# EAGLE board flowerfriend_rev2 (EAGLE 7.2.0)
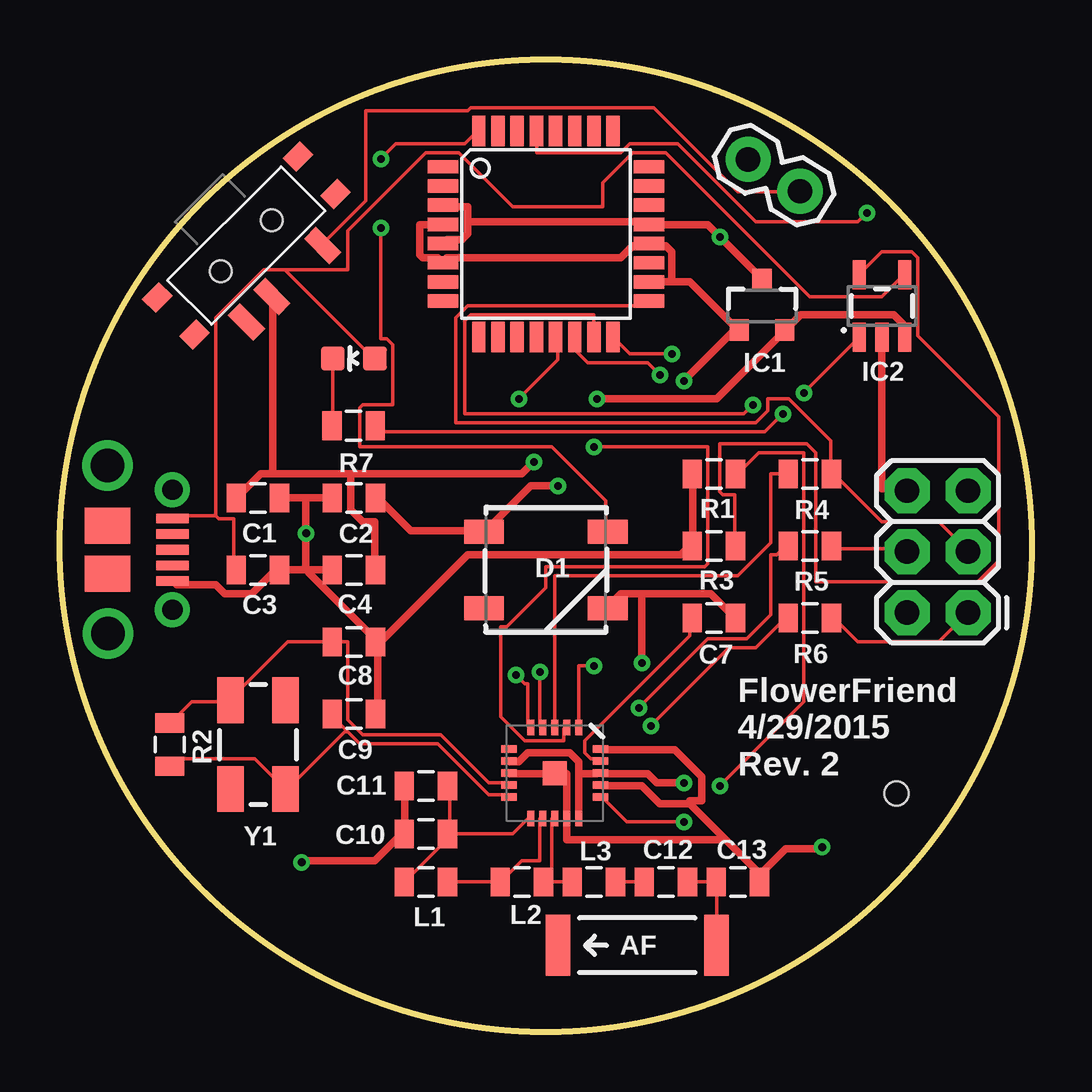
[diagram p0: board, top side]
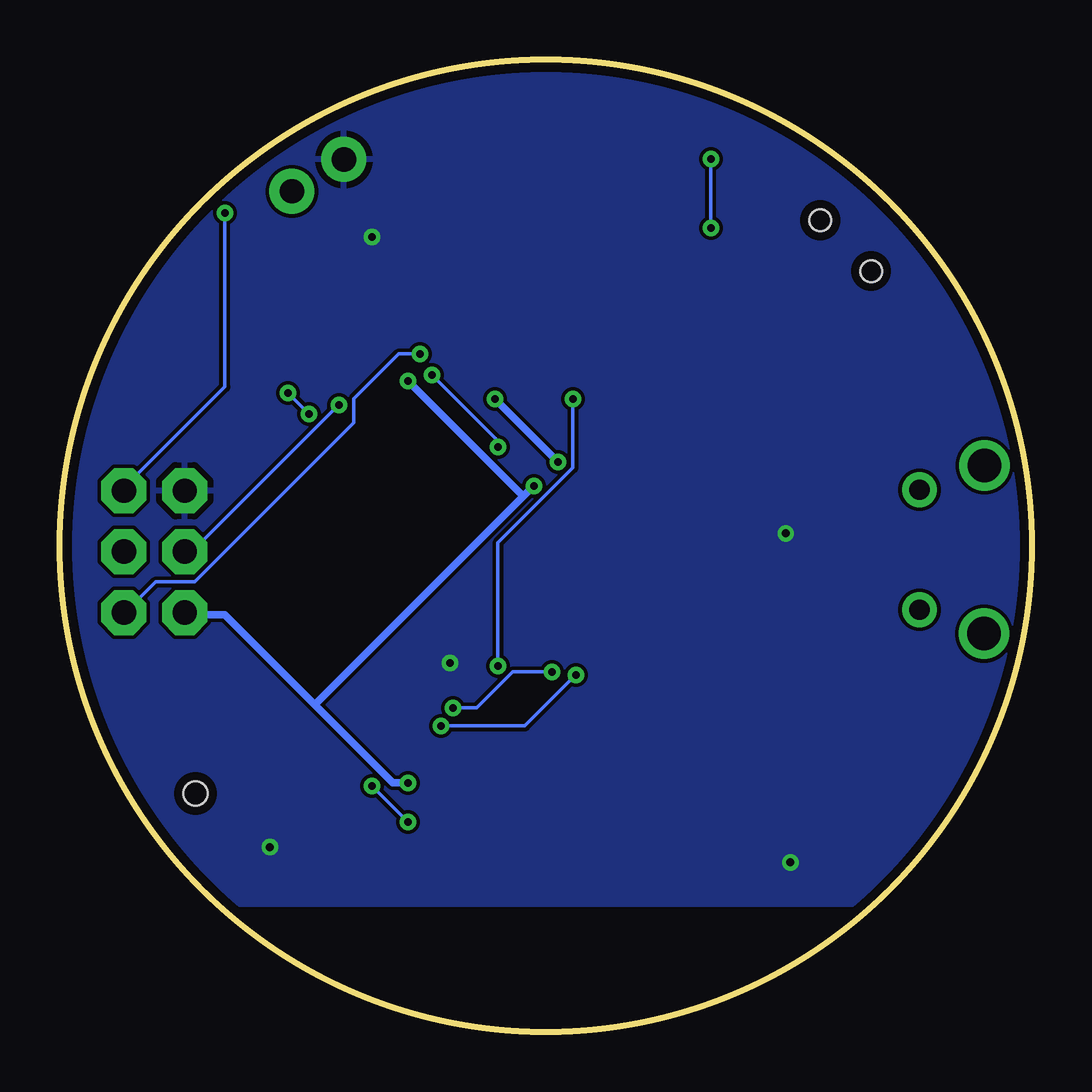
[diagram p1: board, bottom side, seen from below]

Size 40.5 x 40.5 mm. Coordinates in mm from the lower left corner, seen from the top.
Outline: circle at 20.25,20.25 radius 20.25
Copper layers (1*16): Top 0.0356mm / dielectric 1.5011mm / Bottom 0.0356mm
Design rules "LaenPCBOrder *": minimum track width 6mil, minimum drill 13mil, track to track 6mil, track to pad 6mil, pad to pad 6mil, via to via 6mil, smd to smd 6mil, copper to edge 15mil, drill to drill 6mil, minimum pad ring 7mil, minimum via ring 7mil, stop-mask expansion 3mil, vias tented up to drill 0mil, thermal gap 10mil
Net classes: 1 power: width 0.305 mm
Holes 1 mm at 34.85,9.93

## Footprints (pad centres in the part's own frame; a part is rotated, then mirrored left to right if it is on the bottom)
ANTENNA-CHIP5 = smd 1.016 x 2.54: FEED -3.302,0; NC 3.302,0
0805 = smd 0.8 x 1.2: 1 -0.9,0; 2 0.9,0
WS2812B = smd 1.651 x 1: 1 -2.577,1.6; 2 -2.577,-1.6; 3 2.577,-1.6; 4 2.577,1.6
LED-0603 = smd 1 x 1: A 0,-0.877; C 0,0.877
SOT23-3 = smd 0.8 x 0.9: 1 -0.95,-1; 2 0.95,-1; 3 0,1.1
SOT23-5 = smd 0.55 x 1.2: 1 -0.95,-1.3; 2 0,-1.3; 3 0.95,-1.3; 4 0.95,1.3; 5 -0.95,1.3
1X02 = drill 1.016 pad 1.88: 1 0,0; 2 2.54,0
2X3 = drill 1.016 pad 1.88 octagon: 1 0,0; 2 0,2.54; 3 2.54,0; 4 2.54,2.54; 5 5.08,0; 6 5.08,2.54
KPS-1290 = smd 0.7 x 1.5: O -2.25,2.25; P 0.75,2.25; S 2.25,2.25 | smd 1 x 0.8: P$1 -4.15,1.1; P$2 -4.15,-1.1; P$3 4.15,-1.1; P$4 4.15,1.1 | hole 0.9: -1.5,0; 1.5,0
TQFP32-08 = smd 1.27 x 0.559: 1 -4.293,2.8; 2 -4.293,2; 3 -4.293,1.2; 4 -4.293,0.4; 5 -4.293,-0.4; 6 -4.293,-1.2; 7 -4.293,-2; 8 -4.293,-2.8; 17 4.293,-2.8; 18 4.293,-2; 19 4.293,-1.2; 20 4.293,-0.4; 21 4.293,0.4; 22 4.293,1.2; 23 4.293,2; 24 4.293,2.8 | smd 0.559 x 1.27: 9 -2.8,-4.293; 10 -2,-4.293; 11 -1.2,-4.293; 12 -0.4,-4.293; 13 0.4,-4.293; 14 1.2,-4.293; 15 2,-4.293; 16 2.8,-4.293; 25 2.8,4.293; 26 2,4.293; 27 1.2,4.293; 28 0.4,4.293; 29 -0.4,4.293; 30 -1.2,4.293; 31 -2,4.293; 32 -2.8,4.293
QFN20 = smd 1 x 1: 0 0,0 | smd 0.65 x 0.3: 1 -1.9,1; 2 -1.9,0.5; 3 -1.9,0; 4 -1.9,-0.5; 5 -1.9,-1; 11 1.9,-1; 12 1.9,-0.5; 13 1.9,0; 14 1.9,0.5; 15 1.9,1 | smd 0.3 x 0.65: 6 -1,-1.9; 7 -0.5,-1.9; 8 0,-1.9; 9 0.5,-1.9; 10 1,-1.9; 16 1,1.9; 17 0.5,1.9; 18 0,1.9; 19 -0.5,1.9; 20 -1,1.9
USB-MICRO-MOLEX-105017-0001 = smd 0.4 x 1.35: 1 1.2,0; 2 1.85,0; 3 2.5,0; 4 3.15,0; 5 3.8,0 | drill 0.85 pad 1.45: P$1 0,0; P$2 5,0 | smd 1.5 x 1.9: P$3 3.5,-2.7; P$4 1.5,-2.7 | drill 1.4: P$5 -1.004,-2.701; P$6 5.999,-2.69
CRYSTAL-SMD-5X3 = smd 1.9 x 1.1: 1 -1.85,-1.15; 2 1.85,-1.15; 3 1.85,1.15; 4 -1.85,1.15

## Placement (x,y rotation side)
AF  ANTENNA2SMD5  [ANTENNA-CHIP5]  24.05,3.61 180 top
C1  0.1uF  [0805]  8.25,22.25 180 top
C2  0.1uF  [0805]  12.25,22.25 0 top
C3  4.7uF  [0805]  8.25,19.25 180 top
C4  4.7uF  [0805]  12.25,19.25 0 top
C7  33nF  [0805]  27.25,17.25 180 top
C8  22pF  [0805]  12.25,16.25 180 top
C9  22pF  [0805]  12.25,13.25 180 top
C10  2.2nF  [0805]  15.25,8.25 0 top
C11  4.7pF  [0805]  15.25,10.25 0 top
C12  1.5pF  [0805]  25.25,6.25 180 top
C13  1.0pF  [0805]  28.25,6.25 180 top
D1  [WS2812B]  20.25,19.25 0 top
D2  RED  [LED-0603]  12.24,28.06 90 top
IC1  LM3480IM4  [SOT23-3]  29.25,30.25 0 top
IC2  MCP73831  [SOT23-5]  34.25,30.25 0 top
JP1  [1X02]  28.67,36.36 328.4 top
JP2  ICSP  [2X3]  37.84,17.47 90 top
L1  2.7nH  [0805]  15.25,6.25 180 top
L2  8.2nH  [0805]  19.25,6.25 180 top
L3  3.9nH  [0805]  22.25,6.25 0 top
PWR_SWITCH  [KPS-1290]  7.76,32.76 225 top
R1  22k  [0805]  27.25,23.25 0 top
R2  1M  [0805]  4.57,11.97 270 top
R3  2.5k  [0805]  27.25,20.25 0 top
R4  10k  [0805]  31.25,23.25 0 top
R5  10k  [0805]  31.25,20.25 0 top
R6  10k  [0805]  31.25,17.25 0 top
R7  470  [0805]  12.23,25.26 180 top
U2  ATMEGA328P  [TQFP32-08]  20.25,33.25 0 top
U$1  NRF24L01SMD  [QFN20]  20.61,10.79 270 top
USB1  USB-CON-5PIN-105017-0001  [USB-MICRO-MOLEX-105017-0001]  4.68,22.59 270 top
Y1  16MHz  [CRYSTAL-SMD-5X3]  8.25,11.97 270 top

## Library data of the parts
AF U$1 = SparkFun-RF
C1-C4 C7-C13 L1-L3 R1-R7 = SparkFun-Passives
D1 = SparkFun-LED; PROD_ID: DIO-12503
D2 = SparkFun-LED; PROD_ID: DIO-00819
IC1 = SparkFun-PowerIC
IC2 = SparkFun-PowerIC; PROD_ID: IC-09995
JP1 JP2 = SparkFun-Connectors
PWR_SWITCH = SparkFun-Electromechanical; PROD_ID: SWCH-10651
U2 = SparkFun-DigitalIC; PROD_ID: IC-09069
USB1 = GeekAmmo
Y1 = SparkFun-FreqCtrl; PROD_ID: XTAL-08218

## Nets
+3V3 [power]: C2.2 D1.1 IC1.1 JP2.2 U2.4 U2.6 U2.18 U2.20 U$1.7 U$1.15 U$1.18
ANT: AF.FEED C12.1 C13.2
CE: U2.13 U$1.1
CSN: U2.14 U$1.2
GND [power]: C1.1 C2.1 C3.1 C4.1 C7.1 C8.1 C9.1 C10.1 C11.1 C13.1 D1.3 IC1.3 IC2.2 JP1.1 JP2.6 R1.1 R3.1 U2.3 U2.5 U2.21 U$1.0 U$1.8 U$1.14 U$1.17 U$1.20 USB1.5
LEDDATA: D1.4 U2.32
MISO: JP2.1 R6.2 U2.16
MOSI: JP2.4 R5.2 U2.15
N$1: IC2.5 R3.2
N$4: C8.2 R2.1 U$1.9 Y1.1
N$5: C9.2 R2.2 U$1.10 Y1.3
N$6: R4.1 U$1.3
N$7: R5.1 U$1.4
N$8: L2.1 L3.1 U$1.13
N$9: C10.2 C11.2 L1.2 U$1.11
N$10: R1.2 U$1.16
N$11: C7.2 U$1.19
N$12: L1.1 L2.2 U$1.12
N$13: C12.2 L3.2
N$14: R6.1 U$1.5
N$15: JP1.2 PWR_SWITCH.O
N$16: D2.C R7.2
N$17: IC2.1 R7.1
RESET: JP2.5 U2.29
SCK: JP2.3 R4.2 U2.17
VBAT [power]: C1.2 C4.2 IC1.2 IC2.3 PWR_SWITCH.P
VBUS: C3.2 D2.A IC2.4 USB1.1

## Tracks (layer width: path | path; a pad name or v marks a point on that pad's centre or on a via)
+3V3  (via drill 0.33)
  Top 0.305: U2.4 15.87,33.62 15,33.62 15,32.37 15.12,32.25 15.75,32.25 15.87,32.12 U2.6 16,32.12 16.12,32.25 23.37,32.25 23.87,32.75 24.5,32.75 U2.20 24.62,32.75 25.25,32.75 25.5,32.5 25.5,31.25 | U2.18 25.5,31.25 | 25.5,31.25 26.25,31.25 28.25,29.25 IC1.1 28.12,29.25 v26,27.12 | C2.2 13.25,22.25 14.62,20.87 17.62,20.87 D1.1 17.75,20.87 19.62,22.75 v20.75,22.75 | 21.62,10.75 21.62,11.25 21.25,11.62 19.5,11.62 19.12,11.25 18.75,11.25 U$1.7 | 21.62,10.75 21.62,9 U$1.15 | v26,10.37 24.87,10.37 24.5,10.75 22.62,10.75 U$1.18 22.37,10.75 21.62,10.75
  Bottom 0.305: v26,10.37 26.62,10.37 29.87,13.62 | 29.87,13.62 33.62,17.37 35.25,17.37 JP2.2 | 29.87,13.62 21.19,22.31 | 21.19,22.31 v20.75,22.75 | 21.19,22.31 v26,27.12
ANT
  Top 0.152: C12.1 C13.2 27.37,6.25 27.37,3.62 AF.FEED
CE  (via drill 0.33)
  Top 0.152: v22.25,15.25 21.62,15.25 21.62,12.75 U$1.1 | v19.12,26.37 20.75,28 20.75,28.87 U2.13
  Bottom 0.152: v22.25,15.25 22.25,20.37 19.12,23.5 v19.12,26.37
CSN  (via drill 0.33)
  Top 0.152: v22.25,24.37 27,24.37 27,19.5 26.87,19.37 20.25,19.37 20.25,18.5 18.62,16.87 18.37,16.87 18.37,13.12 19.37,12.12 21,12.12 21,12.62 U$1.2 | v25,27.37 24.5,27.87 22,27.87 21.5,28.37 21.5,28.87 U2.14
  Bottom 0.152: v22.25,24.37 22.25,24.62 v25,27.37
GND  (via drill 0.33, 0.33 pad 0.66)
  Top 0.305: R1.1 26.37,23.25 26.37,20.25 R3.1 26.25,20.25 25.87,19.87 17,19.87 13.37,16.25 C8.1 | C9.1 13.25,13.25 13.25,16.25 C8.1 | C4.1 10.37,19.25 | 10.37,19.25 10.25,19.25 | 10.25,19.25 C3.1 9,19.25 8,18.25 6.87,18.25 6.5,18.62 4.87,18.62 4.75,18.75 USB1.5 | C8.1 13.12,16.37 10.37,19.12 10.37,19.25 | 17,33.75 17,34.37 16,34.37 U2.3 | 17,33.75 17,33.25 16.75,33 16.12,33 16,32.87 U2.5 | IC1.3 29.25,31.37 v27.5,33.12 27,33.62 24.62,33.62 U2.21 24.5,33.75 17,33.75 | U$1.8 18.75,10.75 20.5,10.75 U$1.0 20.62,10.75 21.12,10.75 21.12,9 U$1.14 21.12,8.75 21.12,8 27.62,8 27.69,8.06 | 26.25,9.5 25,9.5 24.25,10.25 22.62,10.25 U$1.17 | 27.69,8.06 29.12,6.62 29.12,6.25 C13.1 29.25,6.62 30.25,7.62 31.75,7.62 v31.75,7.7 | 27.69,8.06 26.25,9.5 | U$1.20 22.62,11.75 25.62,11.75 26.75,10.62 26.75,9.62 26.25,9.62 26.25,9.5 | 24.25,18.25 23.37,18.25 22.87,17.75 D1.3 | 24.25,18.25 27.12,18.25 28.12,17.25 C7.1 | C2.1 10.25,22.25 | 10.25,22.25 C1.1 | C11.1 14.37,10.25 14.37,8.25 C10.1 14.25,8.25 13.12,7.12 10.12,7.12 v10.07,7.06 | IC2.2 34.25,22.62 35.25,22.62 JP2.6 | 10.25,22.25 10.25,20.87 v10.26,20.77 10.25,20.62 10.25,19.25 | v24.25,15.37 24.25,18.25
  pour Bottom: 41.25,5.25 -0.75,5.25 -0.75,41.25 41.25,41.25
LEDDATA  (via drill 0.33)
  Top 0.152: v13.37,36.37 14,37 16.87,37 17.37,37.5 U2.32 | v13.37,33.5 13.37,28.87 13.62,28.87 13.87,28.62 13.87,26.12 12.62,26.12 12.5,26 12.5,24.37 20.5,24.37 22.75,22.12 22.75,20.87 D1.4
  Bottom 0.152: v13.37,33.5 v13.37,36.37
MISO  (via drill 0.33)
  Top 0.152: R6.2 32.25,17.25 33.25,16.25 36.62,16.25 37.75,17.37 JP2.1 | v25.5,28.25 23.75,28.25 23.12,28.87 U2.16
  Bottom 0.152: v25.5,28.25 26.37,28.25 28.25,26.37 28.25,25.37 34.87,18.75 36.5,18.75 37.75,17.5 JP2.1
MOSI  (via drill 0.33)
  Top 0.152: R5.2 32.25,20.25 32.37,20.12 35.25,20.12 JP2.4 | U2.15 22.25,29.87 17.12,29.87 16.87,29.62 16.87,25.75 28.5,25.75 v28.87,26.12
  Bottom 0.152: v28.87,26.12 34.87,20.12 35.25,20.12 JP2.4
N$1
  Top 0.152: R3.2 28.12,20.25 28.12,22.37 27.62,22.37 27.5,22.5 27.5,24.5 31.12,24.5 31.5,24.12 31.5,18.75 38.25,18.75 39.12,19.62 39.12,25.62 35.75,29 35.75,32.25 35.5,32.5 34.25,32.5 33.37,31.62 IC2.5
N$4
  Top 0.152: R2.1 4.62,12.87 5.5,13.75 7,13.75 Y1.1 7.12,13.87 9.5,16.25 C8.2 12,16.25 12,13 12.62,12.37 15.87,12.37 17.87,10.37 18.5,10.37 18.62,10.25 U$1.9
N$5
  Top 0.152: R2.2 4.62,11.12 4.87,11.37 8.12,11.37 9.37,10.12 Y1.3 9.5,10.12 11.87,12.5 12,12.5 | 12,12.5 11.25,13.25 C9.2 | 12,12.5 12.5,12 15.75,12 17.87,9.87 18.62,9.87 U$1.10
N$6
  Top 0.152: R4.1 29.62,23.25 29.62,20.37 28.25,19 20.62,19 20.62,12.75 U$1.3
N$7  (via drill 0.33)
  Top 0.152: v20,15 20,12.75 U$1.4 | v24.12,13.5 27,16.37 28.62,16.37 29.62,17.37 29.62,19.87 29.87,19.87 30.25,20.25 R5.1
  Bottom 0.152: v20,15 21.62,15 23.12,13.5 v24.12,13.5
N$8
  Top 0.152: 20.5,6.25 20.5,8.87 U$1.13 | 20.5,6.25 L2.1 20.25,6.25 | 20.5,6.25 L3.1
N$9
  Top 0.152: 16.37,8.25 18.87,8.25 19.5,8.87 U$1.11 | 16.37,8.25 14.37,6.25 L1.2 | 16.37,8.25 16.25,8.25 | 16.25,8.25 16.25,10.25 C11.2 | 16.25,8.25 C10.2
N$10  (via drill 0.33)
  Top 0.152: v26,8.75 23.62,8.75 22.62,9.75 U$1.16 | v27.5,10.25 31,13.75 31,24.12 29.12,24.12 28.25,23.25 R1.2
  Bottom 0.152: v27.5,10.25 v26,8.75
N$11
  Top 0.152: U$1.19 22.5,11.25 22.37,11.37 22.12,11.37 21.87,11.62 21.87,12.12 26.25,16.5 26.25,17.25 C7.2
N$12
  Top 0.152: U$1.12 20,8.87 20,7.12 19.25,7.12 18.37,6.25 L2.2 L1.1
N$13
  Top 0.152: C12.2 L3.2
N$14  (via drill 0.33)
  Top 0.152: v19,14.87 19.37,14.5 19.5,14.5 19.5,12.75 U$1.5 | v24.62,12.75 27.87,16 29,16 30.25,17.25 R6.1
  Bottom 0.152: v19,14.87 21.12,12.75 v24.62,12.75
N$15
  Top 0.152: PWR_SWITCH.O 11,32.87 12.75,34.62 12.75,38.37 17,38.37 17.12,38.5 24.75,38.5 28.25,35 30.75,35 JP1.2
N$16
  Top 0.152: D2.C 11.37,28 11.37,25.37 R7.2
N$17  (via drill 0.33)
  Top 0.152: v30.12,25.75 29.37,25 13.5,25 13.25,25.25 R7.1 | v31,26.62 33.25,28.87 IC2.1
  Bottom 0.152: v31,26.62 v30.12,25.75
RESET  (via drill 0.33)
  Top 0.152: v33.62,34.12 33.25,33.75 29,33.75 25.75,37 23.75,37 23.37,36.62 19.87,36.62 19.87,37.5 U2.29
  Bottom 0.152: v33.62,34.12 33.62,26.87 37.87,22.62 JP2.5
SCK
  Top 0.152: JP2.3 37.75,20.12 36.62,21.25 34.25,21.25 32.25,23.25 R4.2 32.12,23.25 32.12,24.62 30.37,26.37 29.5,26.37 29.5,25.87 29,25.37 16.5,25.37 16.5,29.75 17,30.25 24.37,30.25 24.5,30.37 U2.17
VBAT  (via drill 0.33)
  Top 0.305: IC2.3 35.12,29 35.12,29.5 34.75,29.87 30.87,29.87 30.25,29.25 IC1.2 30.12,29.12 27.37,26.37 v22.37,26.37 | 12.12,23.25 12.12,21.75 12.62,21.25 13.12,21.25 13.12,19.25 C4.2 | 8.87,23.25 8.37,23.25 7.37,22.25 C1.2 | 8.87,23.25 12.12,23.25 | 8.87,23.25 8.87,30.62 PWR_SWITCH.P | v19.75,23.75 19.25,23.25 12.12,23.25
  Bottom 0.305: v19.75,23.75 v22.37,26.37
VBUS
  Top 0.152: 9.37,31.75 13,28.12 D2.A | 9.37,31.75 8.5,31.75 6.5,29.75 6.5,21.5 | 6.5,21.5 4.75,21.5 USB1.1 | 6.5,21.5 6.62,21.37 7.25,21.37 7.25,19.25 C3.2 | 9.37,31.75 12,31.75 12,33.37 15.25,36.62 16.62,36.62 18.87,34.37 22.62,34.37 22.62,35.37 23.87,36.62 25.25,36.62 31.25,30.62 34.25,30.62 35.12,31.5 IC2.4

## Text on the board
tPlace: FlowerFriend / 4/29/2015 / Rev. 2 | Y1